# Altium PCB MainPCB.PcbDoc
Units mil, origin at the board's own origin, x right, y up, seen from the top; angles counter-clockwise.
Board outline 1496.06 x 1102.36 mil, 2 copper layers (Top Layer, Bottom Layer); 3 components, 5 nets, 25 pads, 0 vias.
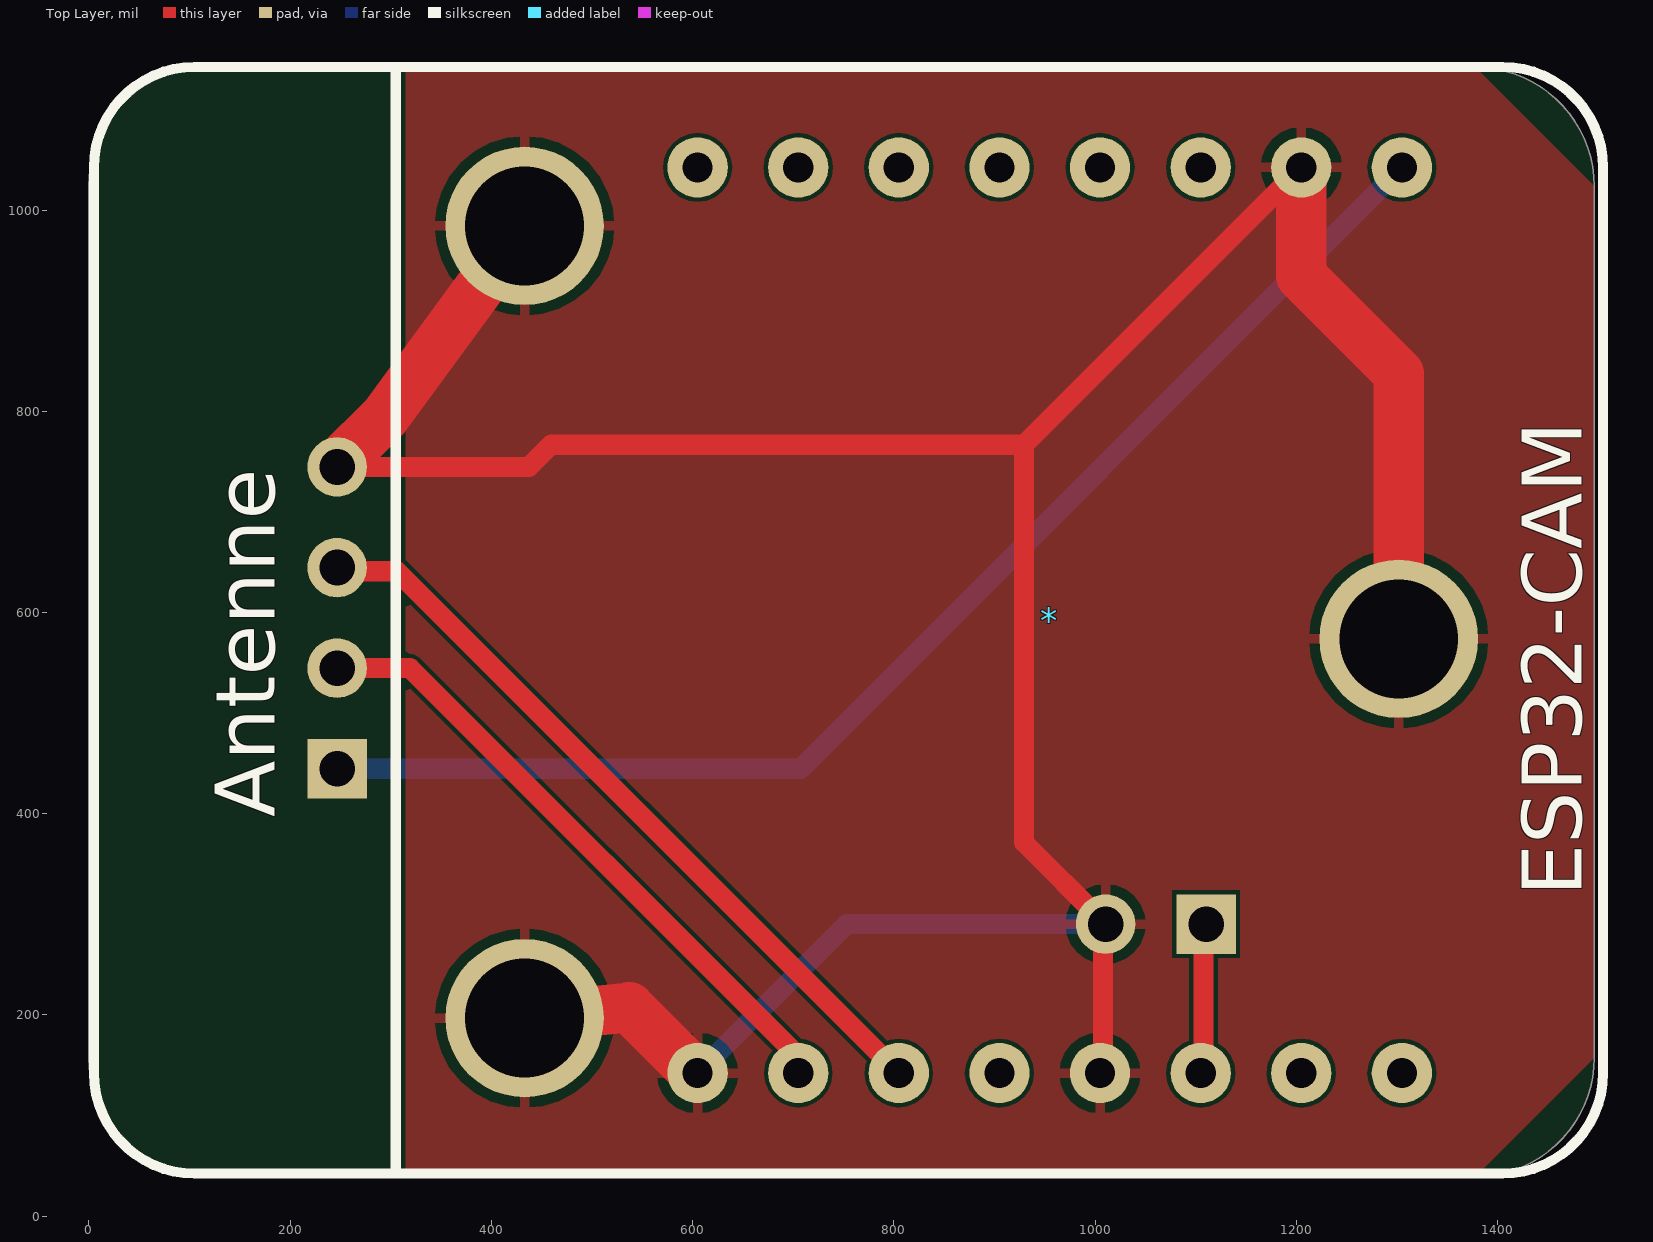
[diagram p0: Top Layer view]
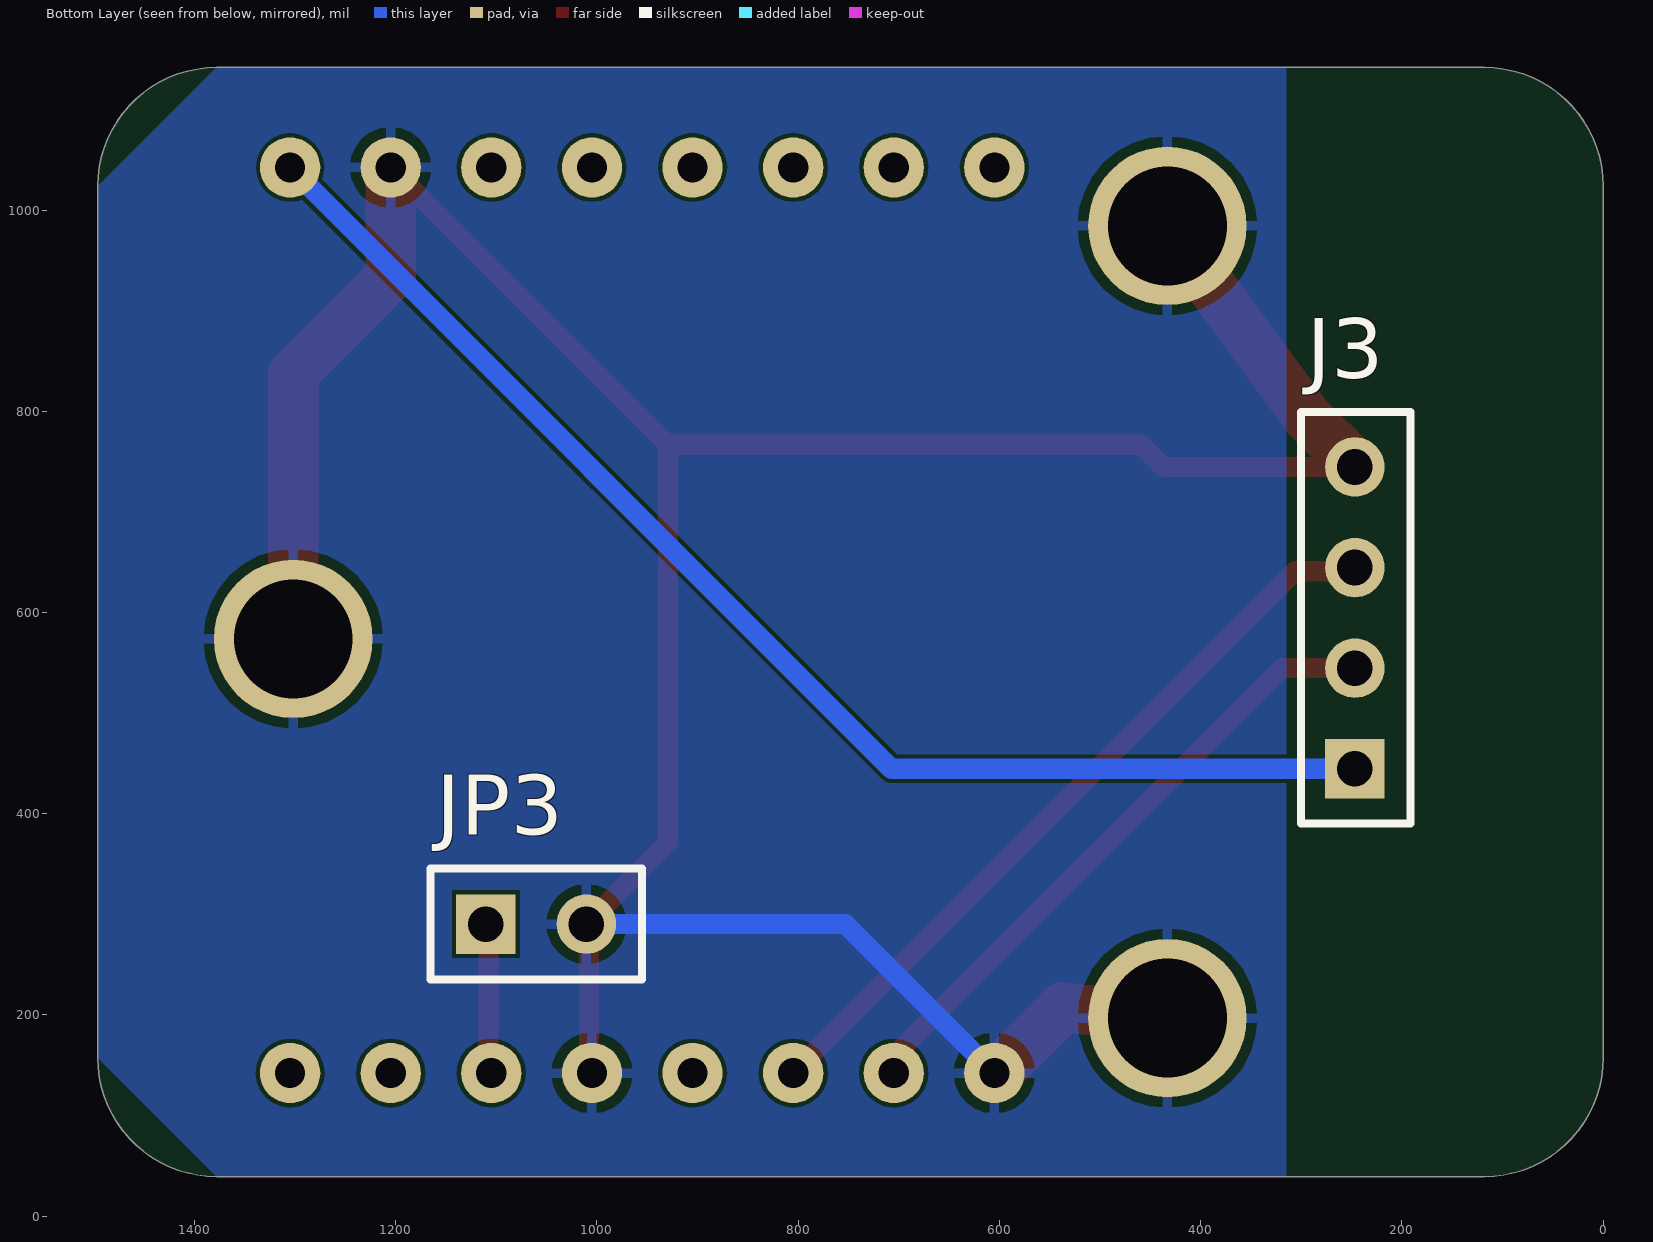
[diagram p1: Bottom Layer view, seen from below]

## Layer stack, top to bottom
Top Solder: solder mask 0.4, Solder Resist, Dk 3.5
Top Layer: signal copper 1.4
Dielectric 1: dielectric 12.6, FR-4, Dk 4.8
Bottom Layer: signal copper 1.4
Bottom Solder: solder mask 0.4, Solder Resist, Dk 3.5

## Board outline
0,157.48 0,1023.62 cw(c118.11,1023.62) 118.11,1141.73 1377.95,1141.73 cw(c1377.95,1023.62) 1496.06,1023.62 1496.06,157.48 cw(c1377.95,157.48) 1377.95,39.37 118.11,39.37 cw(c118.11,157.48)

## Design rules (kind name [scope] priority, off if disabled: settings)
Clearance [All] p1: gap=4 ignorepadtopadclearanceinfootprint=FALSE
HoleSize [All] p1: absolutevalues=TRUE maxlimit=393.7 minlimit=1 maxpercent=80.000 minpercent=20.000
MinimumSolderMaskSliver [All] p1: minsoldermaskwidth=3.94
PlaneClearance [All] p1: clearance=40
PolygonConnect [All] p1: connectstyle=Relief reliefconductorwidth=10 reliefentries=4 polygonreliefangle="90 Angle" airgapwidth=10
RoutingVias [All] p1: holewidth=15 width=30 viastyle="Through Hole" minholewidth=15 minwidth=30 maxholewidth=25 maxwidth=50
SilkToSolderMaskClearance [IsPad] p1: minsilkscreentomaskgap=3.94 clearancetoexposedcopper=TRUE
SolderMaskExpansion [All] p1: expansion=4
Width [All] p1: maxlimit=50 minlimit=10 preferedwidth=10
26 further rules are at their usual default settings.

## Components (designator, comment, footprint, x,y, rotation, side; value= is the part's Value field where it differs from the comment)
* "ESP32-CAM" ESP32-CAM 1405,42.32 r90 top
J3 "BARRETTE_4 CONTACTS_1 RANGEE_MALE_DROITE" BARRETTE_4_M_D 246.73,444.69 r90 bottom
JP3 "JUMPER2" BARRETTE_2_M_D 1110.51,290.35 r180 bottom

## Footprints (in the part's own frame and the unit in brackets; to place one, negate y for a bottom-side part, rotate by r counter-clockwise, add the part's x,y. Pads: shape width x height; smd on the part's side, far side on the other; paste and mask are expansions set on the pad)
BARRETTE_2_M_D [mm] "BARRETTE 2 CONTACTS ; 1 RANGEE ; DROITE ; MALE ; ESPACEMENT BROCHES = 2.54 mm"
  rect 1.5x1.5 hole 0.9: 1(0,0)
  round 1.5 hole 0.9: 2(2.54,0)
  silkscreen extent -1.4,-1.4 3.94,1.4, body extent -1.3,-1.2 3.78,1.3, height 8.55
BARRETTE_4_M_D [mm] "BARRETTE 4 CONTACTS ; 1 RANGEE ; DROIT ; MALE ; ESPACEMENT BROCHES = 2.54 mm"
  rect 1.5x1.5 hole 0.9: 1(0,0)
  round 1.5 hole 0.9: 2(2.54,0) 3(5.08,0) 4(7.62,0)
  silkscreen extent -1.38,-1.4 9.01,1.36, body extent -1.28,-1.3 8.88,1.24, height 10.1
ESP32-CAM [mil]
  round 60 hole 30: 1(100,100) 2(100,200) 3(100,300) 4(100,400) 5(100,500) 6(100,600) 7(100,700) 8(100,800) 9(1000,100) 10(1000,200) 11(1000,300) 12(1000,400) 13(1000,500) 14(1000,600) 15(1000,700) 16(1000,800)
  silkscreen extent 0,-100 1100,1400

## Part data
J3: "BARRETTE 4 CONTACTS 1 RANGEE MALE DROITE", Type=M_D_4
JP3: "BARRETTE 2 CONTACTS 1 RANGEE MALE DROITE", Type=JUMPER2

## Free pads (board coordinates)
  round 157.48 hole 118.11: 2(433.07,196.85) 2(433.07,984.25) 2(1301.85,573.82)

## Nets (pads, with @x,y where several pads share a name; then routed paths per layer and width w, separated by ;. In a path a pad name is that pad's centre, name@x,y a point inside that pad or via, vN(x,y) a via of type N, cw(c..) or ccw(c..) an arc to the next point about the centre after c; other vN are vias at no path point)
+5: *.9 J3.1 | length 1305.8
  Bottom Layer w20: J3.1 707.36,444.69 *.9
GND: *.4 *.8 *.10 J3.4 JP3.2 pad.2 | length 3219.2
  Top Layer w20: J3.4 437.28,744.69 459.33,766.73 929.41,766.73 ; *.4 1007.76,145.08 1007.76,293.11 929.41,371.46 929.41,766.73 ; *.10 929.41,766.73
  Top Layer w50: J3.4 246.73,747.14 293.98,794.38 pad.2@433.07,984.25 ; pad.2@433.07,196.85 536.94,207.68 602.29,142.32 *.8 ; *.10 1205,934.45 1301.85,837.6 pad.2@1301.85,573.82
  Bottom Layer w20: *.8 753.03,290.35 JP3.2
Net*_3: *.3 JP3.1 | length 150.3
  Top Layer w20: *.3 1107.76,145.08 1107.76,287.6 JP3.1
RX_ESP: *.6 J3.3 | length 766.4
  Top Layer w20: J3.3 250.35,641.06 306.26,641.06 *.6
TX_ESP: *.7 J3.2 | length 634.6
  Top Layer w20: J3.2 319.17,544.69 705,158.86 *.7
pads on no net: *.1 *.2 *.5 *.11 *.12 *.13 *.14 *.15 *.16

## Polygon pours and split planes (outlines as drawn)
GND on Top Layer (solid, pour order 6): 314.96,1141.73 314.96,39.37 1377.95,39.37 1496.06,157.48 1496.06,1023.62 1377.95,1141.73
GND on Bottom Layer (solid, pour order 8): 314.96,1141.73 314.96,39.37 1377.95,39.37 1496.06,157.48 1496.06,1023.62 1377.95,1141.73

## Silkscreen, mask and mechanical layers (free items; w line width, h text height)
Mechanical 1:
  the board outline again, w10

## Text inside footprints (layer, text, board x,y; h text height)
*: Top Overlay "Antenne" at 184.53,396.65 h60 r90